# Altium PCB ecs8a_v3_bottom_ina169.PcbDoc
Units mm, origin at the board's own origin, x right, y up, seen from the top; angles counter-clockwise.
Board outline 47.24 x 27.94 mm, 2 copper layers (Top Layer, Bottom Layer); 50 components, 27 nets, 130 pads, 34 vias.
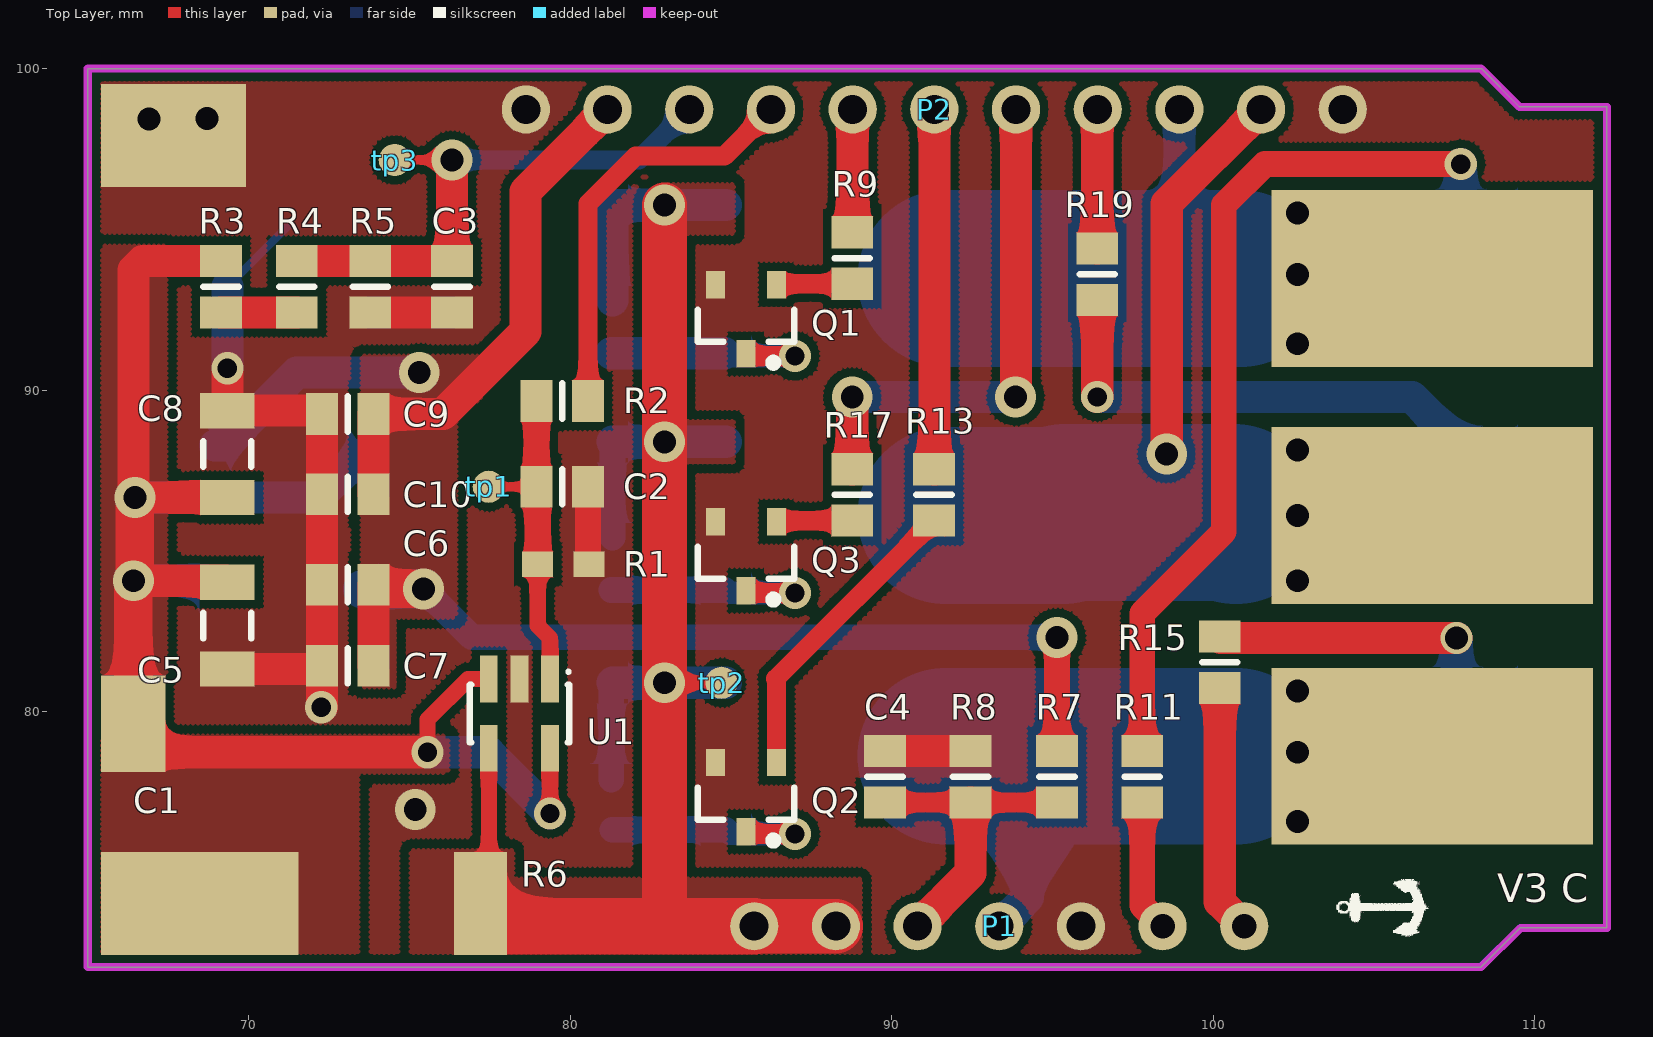
[diagram p0: Top Layer view]
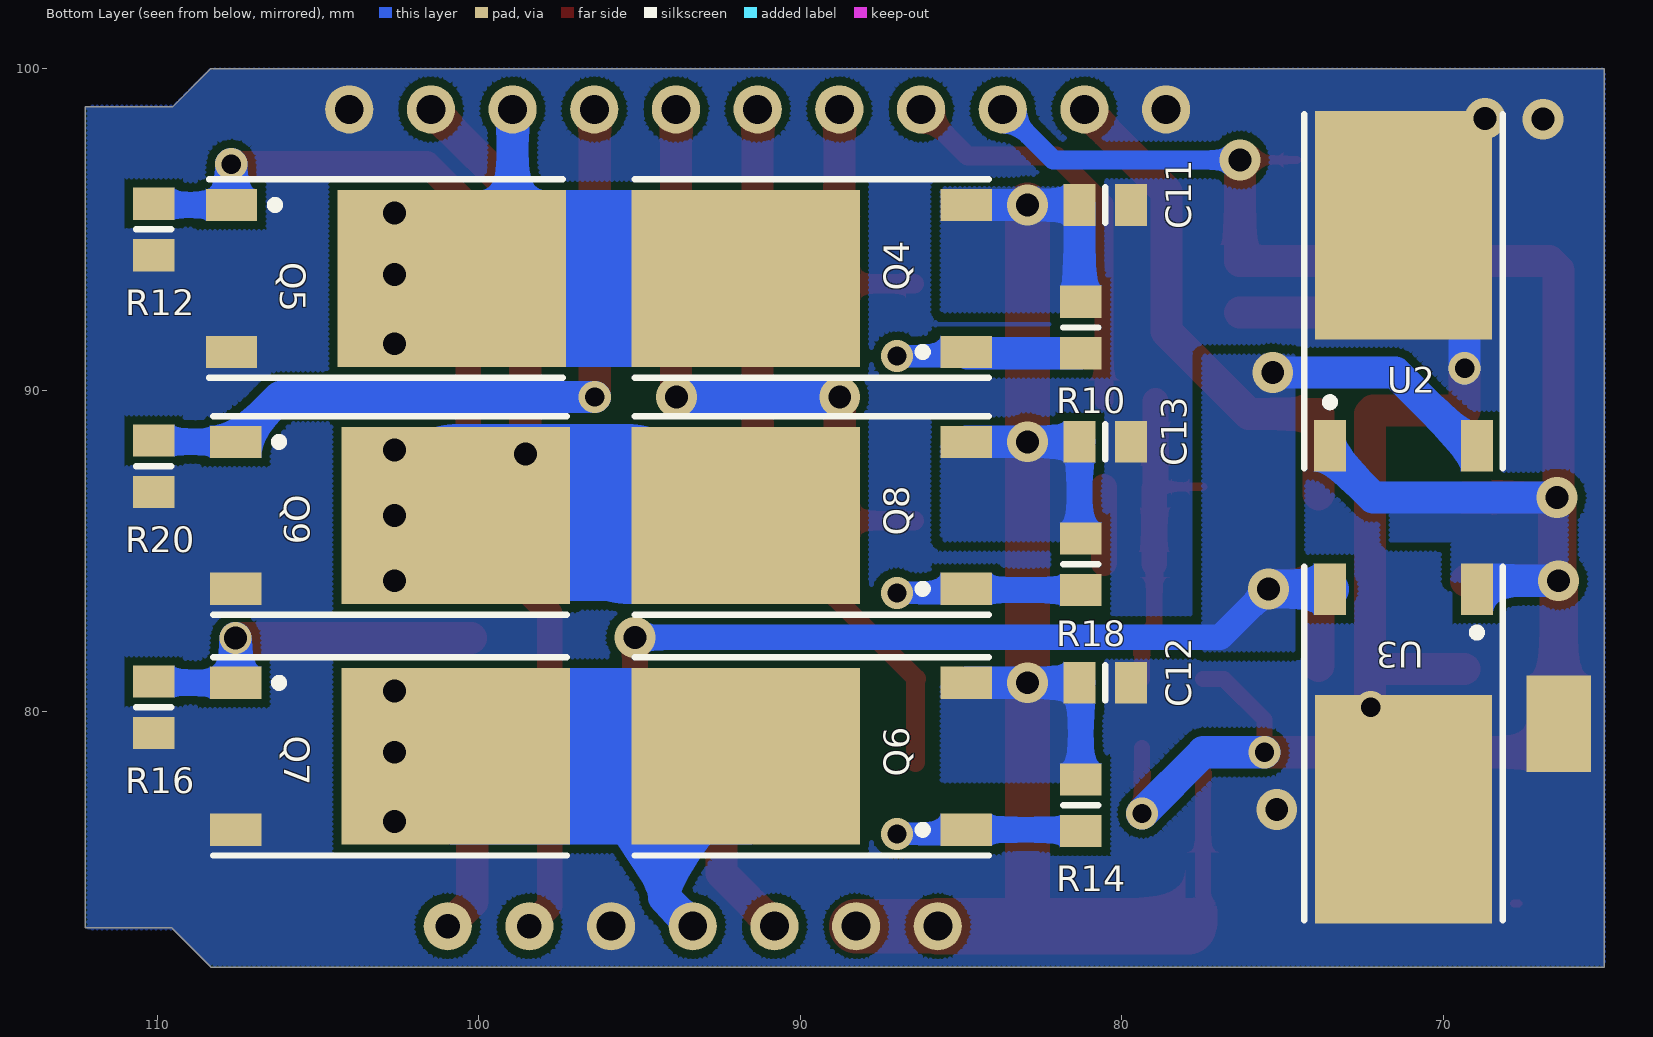
[diagram p1: Bottom Layer view, seen from below]

## Layer stack, top to bottom
Top Solder: solder mask 0.0102, Solder Resist, Dk 3.5
Top Layer: signal copper 0.0356
Dielectric 1: dielectric 0.32, FR-4, Dk 4.8
Bottom Layer: signal copper 0.0356
Bottom Solder: solder mask 0.0102, Solder Resist, Dk 3.5

## Board outline
65,72.06 65,100 108.331,100 109.525,98.806 112.239,98.806 112.239,73.279 109.55,73.279 108.331,72.06

## Design rules (kind name [scope] priority, off if disabled: settings)
Clearance [All] p1: gap=0.254
PolygonConnect [All] p1: connectstyle=Direct reliefconductorwidth=0.254 reliefentries=4 polygonreliefangle="90 Angle" airgapwidth=0.254
RoutingVias [All] p1: holewidth=0.711 width=1.27 viastyle="Through Hole" minholewidth=0.6 minwidth=1 maxholewidth=0.711 maxwidth=1.27
SolderMaskExpansion [All] p1: expansion=0.102
Width [All] p1: maxlimit=6 minlimit=0.254 preferedwidth=0.254
30 further rules are at their usual default settings.

## Components (designator, comment, footprint, x,y, rotation, side; value= is the part's Value field where it differs from the comment)
C1 "Cap Pol1" D_C 66.421,79.629 r90 top
C2 "Cap" 6-0805_L 79.756,86.995 r180 top
C3 "Cap" 6-0805_L 76.327,93.218 r90 top
C4 "Cap" 6-0805_L 89.789,77.978 r270 top
C5 "Cap" C1206 69.342,82.677 r270 top
C6 "Cap" 6-0805_L 73.083,83.947 r180 top
C7 "Cap" 6-0805_L 73.083,81.427 r180 top
C8 "Cap" C1206 69.342,88.011 r90 top
C9 "Cap" 6-0805_L 73.083,89.261 r180 top
C10 "Cap" 6-0805_L 73.083,86.761 r180 top
C11 "Cap" 6-0805_L 80.518,95.758 r0 bottom
C12 "Cap" 6-0805_L 80.518,80.899 r0 bottom
C13 "Cap" 6-0805_L 80.518,88.392 r0 bottom
P1 "Header 1" 7PIN_2.54 85.725,73.33 r0 top locked
P2 "Header 2" 11PIN_2.54 104.027,98.73 r180 top locked
Q1 "2N3904" SOT23_L 85.471,92.202 r270 top
Q2 "2N3904" SOT23_L 85.471,77.343 r270 top
Q3 "2N3904" SOT23_L 85.471,84.836 r270 top
Q4 "IRFR5305" TO-252AA 88.269,93.472 r90 bottom locked
Q5 "IRFR1205" TO-252AA 104.263,93.472 r270 bottom locked
Q6 "IRFR5305" TO-252AA 88.269,78.613 r90 bottom locked
Q7 "IRFR1205" TO-252AA 104.136,78.613 r270 bottom locked
Q8 "IRFR5305" TO-252AA 88.269,86.106 r90 bottom locked
Q9 "IRFR1205" TO-252AA 104.136,86.106 r270 bottom locked
R1 "Res2" 0603 80.594,84.582 r180 top
R2 "Res2" 6-0805_L 79.756,89.662 r0 top
R3 "Res2" 6-0805_L 69.142,93.218 r90 top
R4 "Res2" 6-0805_L 71.501,93.218 r270 top
R5 "Res2" 6-0805_L 73.787,93.218 r90 top
R6 "Res2" 2512_R 70.736,74.041 r0 top
R7 "温度电阻" 6-0805_L 95.138,77.978 r90 top
R8 "Res1" 6-0805_L 92.456,77.978 r270 top
R9 "Res1" 6-0805_L 88.773,94.107 r90 top
R10 "Res3" 6-0805_L 81.28,91.948 r270 bottom
R11 "Res1" 6-0805_L 97.79,77.978 r270 top
R12 "Res3" 6-0805_L 110.109,94.996 r90 bottom
R13 "Res1" 6-0805_L 91.313,86.741 r90 top
R14 "Res3" 6-0805_L 81.28,77.089 r270 bottom
R15 "Res1" 6-0805_L 100.203,81.534 r270 top
R16 "Res3" 6-0805_L 110.109,80.137 r90 bottom
R17 "Res1" 6-0805_L 88.773,86.741 r90 top
R18 "Res3" 6-0805_L 81.28,84.582 r270 bottom
R19 "Res1" 6-0805_L 96.393,93.599 r90 top
R20 "Res3" 6-0805_L 110.109,87.63 r90 bottom
tp1 "tp" tp 77.47,86.995 r0 top
tp2 "tp" tp 84.709,80.899 r90 top
tp3 "tp" tp 74.549,97.155 r90 top
U1 "INA169" SOT23-5 78.425,79.942 r180 top
U2 "78M05" TO-252AA 71.247,91.698 r180 bottom locked
U3 "78M05" TO-252AA 71.247,80.387 r0 bottom locked

## Footprints (in the part's own frame and the unit in brackets; to place one, negate y for a bottom-side part, rotate by r counter-clockwise, add the part's x,y. Pads: shape width x height; smd on the part's side, far side on the other; paste and mask are expansions set on the pad)
6-0805_L [mm] "Chip Resistor, Body 2.0x1.2mm, IPC High Density"
  rect 1x1.3 smd: 1(-0.8,0) 2(0.8,0)
  silkscreen extent 0,-0.55 0,0.55, body extent -1.07,-0.7 1.07,0.7, height 0.7
7PIN_2.54 [mm]
  round 1.5 hole 0.9: 1(0,0) 2(2.54,0) 3(5.08,0) 4(7.62,0) 5(10.16,0)
  round 1.5 hole 0.762: 6(12.7,0) 7(15.24,0)
11PIN_2.54 [mm]
  round 1.5 hole 0.9: 1(0,0) 2(2.54,0) 3(5.08,0) 4(7.62,0) 5(10.16,0) 6(12.7,0) 7(15.24,0) 8(17.78,0) 9(20.32,0) 10(22.86,0) 11(25.4,0)
0603 [mm]
  rect 0.965x0.8 smd: 1(0,0) 2(1.6,0)
2512_R [mm]
  rect 1.65x3.2 smd: 1(0,0) 2(6.48,0)
C1206 [mm] "Chip Capacitor, Body 3.2x1.6mm, IPC High Density"
  rect 1.1x1.7 smd: 1(-1.35,0) 2(1.35,0)
  silkscreen extent -0.4,-0.75 0.4,0.75, body extent -1.7,-0.9 1.7,0.9, height 1.3
D_C [mm]
  rect 3x2 smd: 1(0,0)
  rect 3x2 smd far side: 2(0,0)
SOT23-5 [mm] "SOT-23/SC-74A; 5 Leads; Body 3 x 3 mm, inc. leads (LxW max)"
  rect 0.55x1.45 smd: 1(-0.95,-1.075) 2(0,-1.075) 3(0.95,-1.075) 4(0.95,1.075) 5(-0.95,1.075)
  silkscreen extent -1.58,-1.35 1.55,0.9
SOT23_L [mm] "SOT23, 3-Leads, Body 2.9x1.3mm, Pitch 0.95mm, Lead Span 2.3mm - Reverse Pinning, IPC High Density"
  rect 0.85x0.6 smd: 1(1.075,0) 2(-1.075,-0.95) 3(-1.075,0.95)
  silkscreen extent -0.3,-1.5 1.47,1.5, body extent -0.7,-1.5 0.7,1.5, height 1.1
TO-252AA [mm] "D-PAK/TO-252-AA; 3 Leads (1 Cropped); Body 10.4 (inc. leads) x 6.7 mm (LxW max)"
  rect 1x1.6 smd: 1(-2.285,-3.425) 3(2.285,-3.425)
  rect 5.5x7.1 smd: 4(0,3.425)
  silkscreen extent -3.09,-4.13 3.09,6.88
tp [mm]
  round 1 smd: 1(0,0)

## Part data
C1: "Polarized Capacitor (Radial)"
C2 C3 C4 C5 C6 C7 C8 C9 C10 C11 C12 C13: "Capacitor"
P1: library part "Header 7", "Header, 7-Pin"
P2: library part "Header 11", "Header, 11-Pin"
Q1 Q2 Q3: "NPN General Purpose Amplifier"
Q4 Q5 Q6 Q7 Q8 Q9: "HEXFET Power MOSFET"
R1 R2 R3 R4 R5 R6 R8 R9 R10 R11 R12 R13 R14 R15 R16 R17 R18 R19 R20: "Resistor"
R7: library part Res1, "Resistor"
U2 U3: library part Component_1

## Free pads (board coordinates)
  rect 4.5x3.2 smd: 1(67.671,74.041) 2(67.671,97.917)
  rect 10x5.5 smd: 3(106.807,93.472) 4(106.807,86.106) 5(106.807,78.613)

## Via types
v1: diameter 1.27, hole 0.711, Top Layer to Bottom Layer, 24 vias
v2: diameter 1, hole 0.6, Top Layer to Bottom Layer, 9 vias
v3: diameter 1, hole 0.711, Top Layer to Bottom Layer, 1 vias

## Nets (pads, with @x,y where several pads share a name; then routed paths per layer and width w, separated by ;. In a path a pad name is that pad's centre, name@x,y a point inside that pad or via, vN(x,y) a via of type N, cw(c..) or ccw(c..) an arc to the next point about the centre after c; other vN are vias at no path point)
+5V_BEC: C6.1 C7.1 C9.1 C10.1 P2.10 R7.2 U2.3 U3.3 | length 53.6
  Top Layer w0.254: C6.1 C6.1@74.01,83.82
  Top Layer w0.8: R7.2 v1(95.138,82.311)
  Top Layer w1: C7.1 C6.1 ; C10.1 C9.1 76.053,89.261 78.613,91.821 78.613,96.176 P2.10
  Top Layer w1.2: C6.1@74.01,83.82 v1(75.438,83.82)
  Bottom Layer w0.254: U3.3@73.423,83.812 U3.3 ; v1@75.43,83.812 v1(75.438,83.82)
  Bottom Layer w0.8: v1(75.438,83.82) 76.947,82.311 v1(95.138,82.311)
  Bottom Layer w1: U2.3 69.223,88.273 71.501,90.551 v1(75.311,90.551)
  Bottom Layer w1.2: U3.3 v1@75.43,83.812
AH: P2.7 R9.2 | length 3.8
  Top Layer w0.254: R9.2 R9.2@88.787,94.921
  Top Layer w1: R9.2@88.787,94.921 P2.7
AL: P1.6 R11.2 | length 4.1
  Top Layer w0.8: R11.2 97.79,73.965 P1.6
BH: P2.6 R13.2 | length 11.2
  Top Layer w1: R13.2@91.327,87.541 P2.6
BL: P1.7 R15.2 | length 7.7
  Top Layer w1: R15.2 100.203,74.092 P1.7
CH: P2.5 R17.2 | length 16.3
  Top Layer w1: R17.2 v1(88.773,89.789) ; v1(93.853,89.789) 93.867,89.803 P2.5
  Bottom Layer w1: v1(88.773,89.789) v1(93.853,89.789)
CL: P2.4 R19.2 | length 4.3
  Top Layer w0.254: P2.4@96.393,98.716 P2.4
  Top Layer w1: R19.2 P2.4@96.393,98.716
CURRENT: P2.8 R2.2 | length 13
  Top Layer w0.6: R2.2 80.556,95.796 82.042,97.282 84.799,97.282 P2.8
GND: C1.2 C2.1 C3.1 C4.1 C5.2 C6.2 C7.2 C8.2 C9.2 C10.2 C11.1 C12.1 C13.1 P1.5 P2.1 P2.11 pad.2 Q1.2 Q2.2 Q3.2 Q5.3 Q7.3 Q9.3 R1.1 R5.1 R8.1 R12.1 R16.1 R20.1 U1.2 U2.4 U3.4 | length 29.3
  Top Layer w0.254: v2(72.263,80.137) v2@72.283,80.157 ; R1.1@80.556,84.62 R1.1
  Top Layer w0.8: C7.2@72.183,81.327 C7.2 ; R1.1@80.556,84.62 C2.1
  Top Layer w1: C5.2 C7.2@72.183,81.327 ; v2(69.342,90.678) C8.2 72.183,89.361 C9.2 C10.2 C6.2 C7.2 v2@72.283,80.157 ; R5.1 C3.1 ; C4.1 R8.1
  Bottom Layer w0.254: U2.4@69.342,93.218 U2.4
  Bottom Layer w1: v2(69.342,90.678) U2.4@69.342,93.218
  other v1: 75.184,76.962 66.904,98.425 68.707,98.45
NetC2_2: C2.2 R1.2 R2.1 tp1.1 U1.1 | length 10.3
  Top Layer w0.254: tp1.1 C2.2 C2.2@78.994,86.957 ; 78.994,82.677 79.057,82.614
  Top Layer w0.5: 78.994,82.677 R1.2 ; 79.057,82.614 79.375,82.296 U1.1
  Top Layer w0.8: C2.2 R2.1 ; R1.2 C2.2@78.994,86.957
NetQ1_1: Q1.1 Q4.1 R10.2 | length 7.3
  Top Layer w0.254: Q1.1 Q1.1@85.539,91.059
  Top Layer w0.6: Q1.1@85.539,91.059 v2(86.995,91.059)
  Bottom Layer w0.254: Q4.1@84.805,91.148 84.836,91.179 Q4.1@84.956,91.059
  Bottom Layer w0.7: Q4.1@84.956,91.059 v2(86.995,91.059)
  Bottom Layer w1: R10.2 Q4.1@84.805,91.148
NetQ1_3: Q1.3 R9.1 | length 2.4
  Top Layer w0.254: Q1.3 Q1.3@86.451,93.307
  Top Layer w0.6: Q1.3@86.451,93.307 R9.1
NetQ2_1: Q2.1 Q6.1 R14.2 | length 7.3
  Top Layer w0.254: Q2.1 Q2.1@85.539,76.2
  Top Layer w0.6: Q2.1@85.539,76.2 v2(86.995,76.2)
  Bottom Layer w0.254: Q6.1 Q6.1@84.972,76.2
  Bottom Layer w0.7: Q6.1@84.972,76.2 v2(86.995,76.2)
  Bottom Layer w0.8: R14.2@81.319,76.328 Q6.1
NetQ2_3: Q2.3 R13.1 | length 9.6
  Top Layer w0.254: 86.398,81.026 86.421,81.003
  Top Layer w0.6: 86.398,81.026 R13.1 ; Q2.3 86.421,81.003
NetQ3_1: Q3.1 Q8.1 R18.2 | length 7.3
  Top Layer w0.254: Q3.1 Q3.1@85.539,83.693
  Top Layer w0.6: Q3.1@85.539,83.693 v2(86.995,83.693)
  Bottom Layer w0.254: Q8.1@84.805,83.782 84.836,83.813 Q8.1@84.956,83.693
  Bottom Layer w0.7: Q8.1@84.956,83.693 v2(86.995,83.693)
  Bottom Layer w0.8: R18.2 Q8.1@84.805,83.782
NetQ3_3: Q3.3 R17.1 | length 2.4
  Top Layer w0.254: Q3.3 Q3.3@86.451,85.941 ; R17.1@88.743,85.911 R17.1
  Top Layer w0.6: Q3.3@86.451,85.941 R17.1
NetQ5_1: Q5.1 R11.1 R12.2 | length 29.6
  Top Layer w0.8: R11.1 97.79,83.058 100.33,85.598 100.33,95.758 101.6,97.028 v2(107.696,97.028)
  Bottom Layer w0.254: Q5.1 Q5.1@107.696,95.765 ; R12.2@110.07,95.757 R12.2
  Bottom Layer w0.8: Q5.1 R12.2@110.07,95.757
  Bottom Layer w1: Q5.1@107.696,95.765 v2(107.696,97.028)
NetQ7_1: Q7.1 R15.1 R16.2 | length 11.3
  Top Layer w0.254: R15.1 R15.1@100.241,82.296
  Top Layer w1: R15.1@100.241,82.296 v3(107.569,82.296)
  Bottom Layer w0.254: v3@107.561,82.288 v3(107.569,82.296) ; R16.2@110.07,80.898 R16.2
  Bottom Layer w0.8: Q7.1 R16.2@110.07,80.898
  Bottom Layer w1: Q7.1 v3@107.561,82.288
NetQ9_1: Q9.1 R19.1 R20.2 | length 17.4
  Top Layer w1: v2(96.393,89.789) R19.1
  Bottom Layer w0.254: Q9.1 Q9.1@107.561,88.407 ; R20.2@110.021,88.391 R20.2@110.109,88.303
  Bottom Layer w0.8: Q9.1 R20.2@110.021,88.391
  Bottom Layer w1: v2(96.393,89.789) 106.179,89.789 Q9.1@107.561,88.407
NetR3_1: R3.1 R4.2 | length 2.4
  Top Layer w1: R3.1 R4.2
PHASEA: P2.3 pad.3 Q4.4 Q5.4 | length 15.2
  Bottom Layer w0.254: Q5.4@98.947,95.363 Q5.4
  Bottom Layer w1: Q5.4@98.947,95.363 P2.3
  Bottom Layer w5.5: Q4.4 Q5.4
  other v1: 102.616,91.44 102.616,93.599 102.616,95.504
PHASEB: P1.4 pad.5 Q6.4 Q7.4 | length 17.2
  Bottom Layer w0.254: Q6.4 Q6.4@94.234,78.613
  Bottom Layer w1: P1.4 94.234,74.219 Q6.4@94.234,78.613
  Bottom Layer w5.5: Q6.4 Q7.4
  other v1: 102.616,76.581 102.616,78.74 102.616,80.645
PHASEC: P2.2 pad.4 Q8.4 Q9.4 | length 21
  Top Layer w1: v1(98.552,88.011) 98.552,95.795 P2.2
  Bottom Layer w5.5: Q8.4 95.316,86.106 95.399,86.189 100.628,86.189 Q9.4
  other v1: 102.616,84.074 102.616,86.106 102.616,88.138
TEMP_ADC: C4.2 P1.3 R7.1 R8.2 | length 9.9
  Top Layer w0.254: P1.3 P1.3@90.856,73.33
  Top Layer w0.6: C4.2 R8.2 R7.1
  Top Layer w1: P1.3 92.456,74.981 R8.2
VBAT: C3.2 P2.9 R4.1 R5.2 tp3.1 | length 17.8
  Top Layer w0.254: tp3.1 v1(76.327,97.155) ; C3.2 76.263,94.081 C3.2@76.327,94.145
  Top Layer w1: R4.1 R5.2 C3.2 ; C3.2@76.327,94.145 v1(76.327,97.155)
  Bottom Layer w0.6: v1(76.327,97.155) 82.132,97.155 P2.9
VCC: C1.1 C5.1 C8.1 pad.1 R3.2 R6.1 U1.3 U1.5 U2.1 U3.1 | length 53.1
  Top Layer w0.254: C1.1 C1.1@67.31,78.74 ; v1(66.421,84.074) v1@66.468,84.121 ; v1@66.421,86.708 v1(66.468,86.661) ; pad.1 pad.1@67.803,74.041 ; C5.1@69.295,84.074 C5.1 ; C8.1@69.295,86.614 C8.1
  Top Layer w0.5: v2(75.565,78.74) 75.565,79.756 76.826,81.017 U1.3 ; v2(79.375,76.835) U1.5
  Top Layer w1: v1(66.421,84.074) C5.1@69.295,84.074 ; v1@66.421,86.708 66.421,93.726 66.713,94.018 R3.2 ; v1(66.468,86.661) C8.1 ; C1.1@67.31,78.74 v2(75.565,78.74)
  Top Layer w1.2: C1.1 v1(66.421,84.074) ; v1@66.468,84.121 v1(66.468,86.661)
  Bottom Layer w0.254: U3.1@68.7,84.074 U3.1 ; U2.1@73.532,88.01 U2.1
  Bottom Layer w1: v1(66.421,84.074) U3.1@68.7,84.074 ; v1(66.468,86.661) 72.183,86.661 U2.1@73.532,88.01 ; v2(75.565,78.74) 77.47,78.74 v2(79.375,76.835)
VCC_12V: C11.2 C12.2 C13.2 P1.1 P1.2 Q4.3 Q6.3 Q8.3 R6.2 R10.1 R14.1 R18.1 tp2.1 U1.4 | length 60.2
  Top Layer w0.254: R6.2@77.475,74.3 R6.2 R6.2@77.927,73.33 ; 82.931,73.457 83.058,73.33 ; v1(82.931,80.899) tp2.1
  Top Layer w0.5: R6.2@77.475,74.3 U1.4
  Top Layer w1.4: 82.931,73.457 v1(82.931,80.899) v1(82.931,88.392) v1(82.931,95.758)
  Top Layer w1.7: P1.1 P1.2
  Top Layer w1.75: R6.2@77.927,73.33 83.058,73.33 P1.1
  Bottom Layer w0.254: C12.2@81.28,80.861 C12.2 ; R18.1 R18.1@81.318,85.42 ; R10.1 R10.1@81.318,92.786 ; Q6.3 Q6.3 ; Q8.3 Q8.3 ; Q4.3 Q4.3
  Bottom Layer w0.8: R14.1 C12.2@81.28,80.861 ; R18.1@81.318,85.42 C13.2
  Bottom Layer w1: C12.2 v1(82.931,80.899) Q6.3 ; C13.2 v1(82.931,88.392) Q8.3 ; R10.1@81.318,92.786 C11.2 v1(82.931,95.758) Q4.3

## Polygon pours and split planes (outlines as drawn)
VCC on Top Layer "top_vcc_1" (hatched 90Degree grid 0 track 0.152, remove dead copper, pour order 2): 73.025,72.06 65,72.06 65,79.248 76.2,79.248 76.2,78.105 73.406,78.105 73.406,72.06 73.025,72.06
VCC on Top Layer "top_vcc_2" (hatched 90Degree grid 0 track 0.152, remove dead copper, pour order 4): 67.418,81.126 67.437,81.145 67.437,83.185 67.437,94.488 65,94.488 65,81.153 65.027,81.126 67.418,81.126
+5V_BEC on Top Layer "top_5v_bec_1" (hatched 90Degree grid 0 track 0.152, remove dead copper, pour order 8): 77.216,91.059 73.533,91.059 73.533,80.772 74.549,80.772 74.549,82.931 76.454,82.931 76.454,89.662 77.216,89.662 77.216,91.059
VCC_12V on Top Layer "top_vcc12_1" (hatched 90Degree grid 0 track 0.152, remove dead copper, pour order 10): 75.057,72.06 75.057,75.692 78.232,75.692 78.232,74.803 81.661,74.803 89.027,74.803 89.027,72.06 75.057,72.06
VCC_12V on Top Layer "top_vcc12_2" (hatched 90Degree grid 0 track 0.152, remove dead copper, pour order 12): 82.931,96.393 85.09,96.393 85.09,94.869 82.931,94.869 82.931,96.393
VCC_12V on Top Layer "top_vcc12_3" (hatched 90Degree grid 0 track 0.152, remove dead copper, pour order 14): 82.423,89.027 85.09,89.027 85.09,87.757 82.423,87.757 82.423,89.027
GND on Top Layer "top_gnd" (hatched 90Degree grid 0 track 0.152, remove dead copper, pour order 36): 65,72.06 65,100 108.331,100 109.525,98.806 112.239,98.806 112.239,73.279 109.55,73.279 108.331,72.06 65,72.06
+5V_BEC on Bottom Layer "bottom_5vbec_1" (hatched 90Degree grid 0 track 0.152, remove dead copper, pour order 16): 74.676,91.059 74.676,82.804 74.676,81.915 76.835,81.915 77.47,81.915 77.47,91.059 74.676,91.059
VCC on Bottom Layer "bottom_vcc_1" (hatched 90Degree grid 0 track 0.152, remove dead copper, pour order 18): 66.167,86.868 66.167,84.074 69.723,84.074 69.723,85.344 71.628,85.344 71.628,86.868 66.167,86.868
VCC_12V on Bottom Layer "bottom_vcc12v_1" (hatched 90Degree grid 0 track 0.152, remove dead copper, pour order 22): 85.598,96.266 85.598,92.456 81.534,92.456 81.534,96.266 85.598,96.266
VCC_12V on Bottom Layer "bottom_vcc12v_2" (hatched 90Degree grid 0 track 0.152, remove dead copper, pour order 24): 81.28,85.382 81.318,85.42 81.318,88.392 85.598,88.392 85.598,85.344 81.318,85.344 81.28,85.382
VCC_12V on Bottom Layer "bottom_vcc12v_3" (hatched 90Degree grid 0 track 0.152, remove dead copper, pour order 26): 81.318,80.899 85.598,80.899 85.598,77.851 84.328,77.851 81.28,77.851 81.318,77.889 81.318,80.899
GND on Bottom Layer "bottom_gnd" (hatched 90Degree grid 0 track 0.152, remove dead copper, pour order 34): 109.601,73.279 112.141,73.279 112.141,98.806 109.474,98.806 108.331,99.949 65.024,99.949 65.024,72.136 108.331,72.136 109.474,73.279 109.601,73.279

## Keep-outs
Top Layer:
  the board outline again, w0.254

## Silkscreen, mask and mechanical layers (free items; w line width, h text height)
Top Overlay:
  drawing of 1033 lines, arcs and shapes, not listed
  text "V3 C" at 108.839,73.787 h1.52